# Altium PCB LoRa-E5-Study-Board-1401-02-28.PcbDoc
Units mm, origin at the board's own origin, x right, y up, seen from the top; angles counter-clockwise.
Board outline 90 x 50 mm, 2 copper layers (Top Layer, Bottom Layer); 84 components, 65 nets, 320 pads, 40 vias.
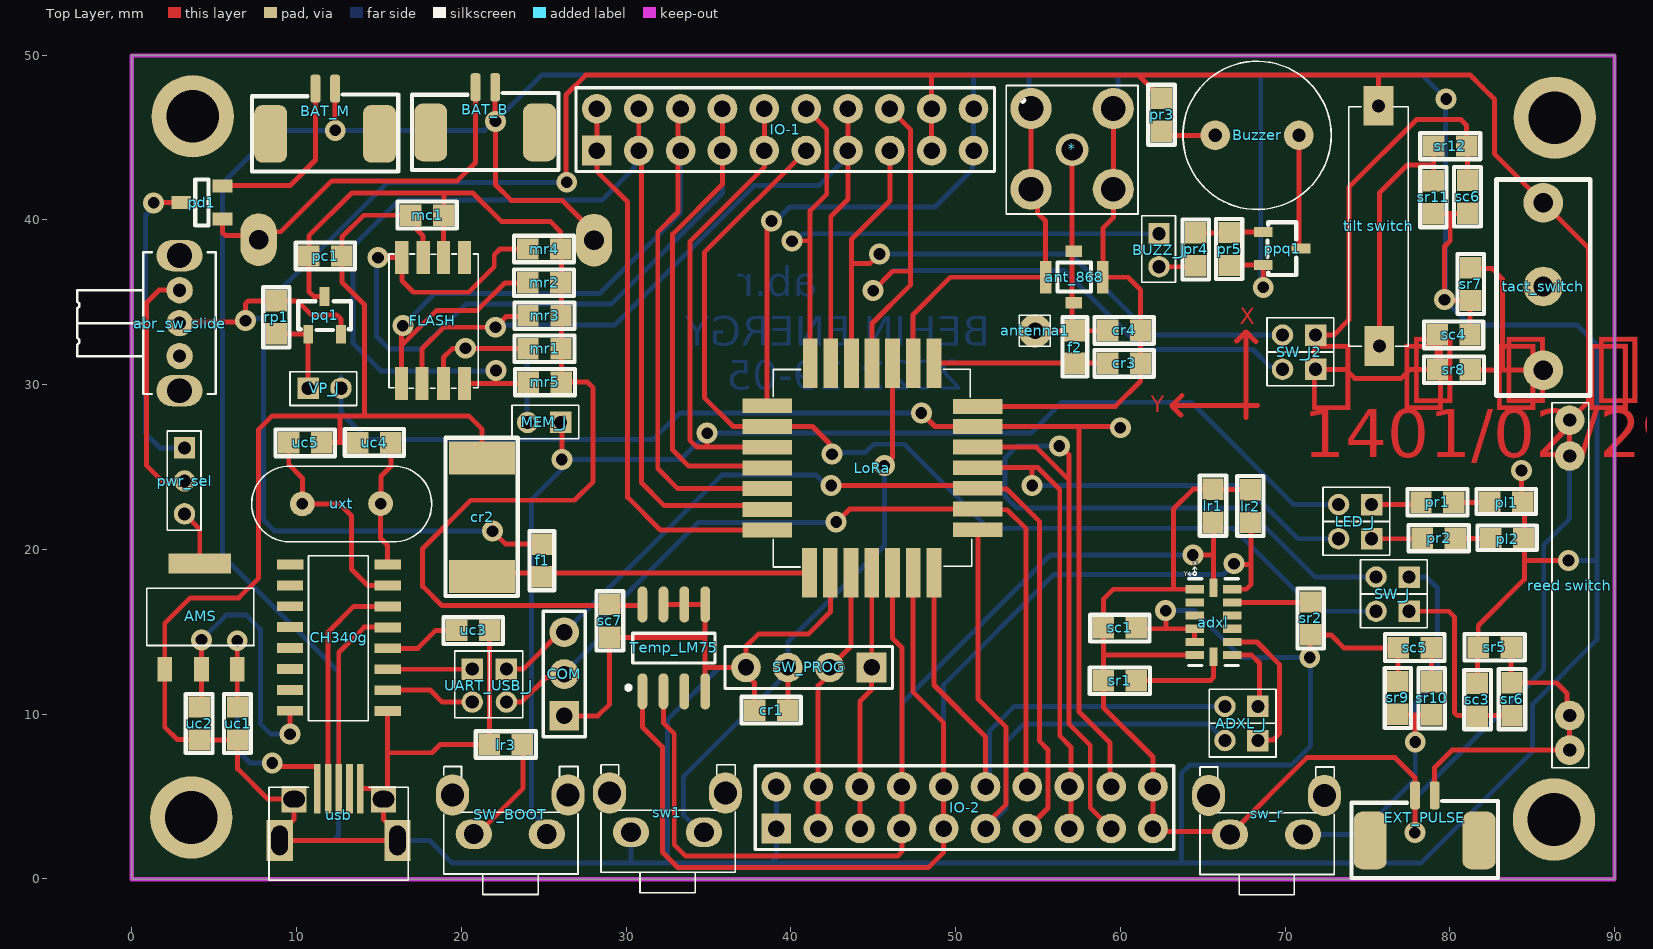
[diagram p0: Top Layer view]
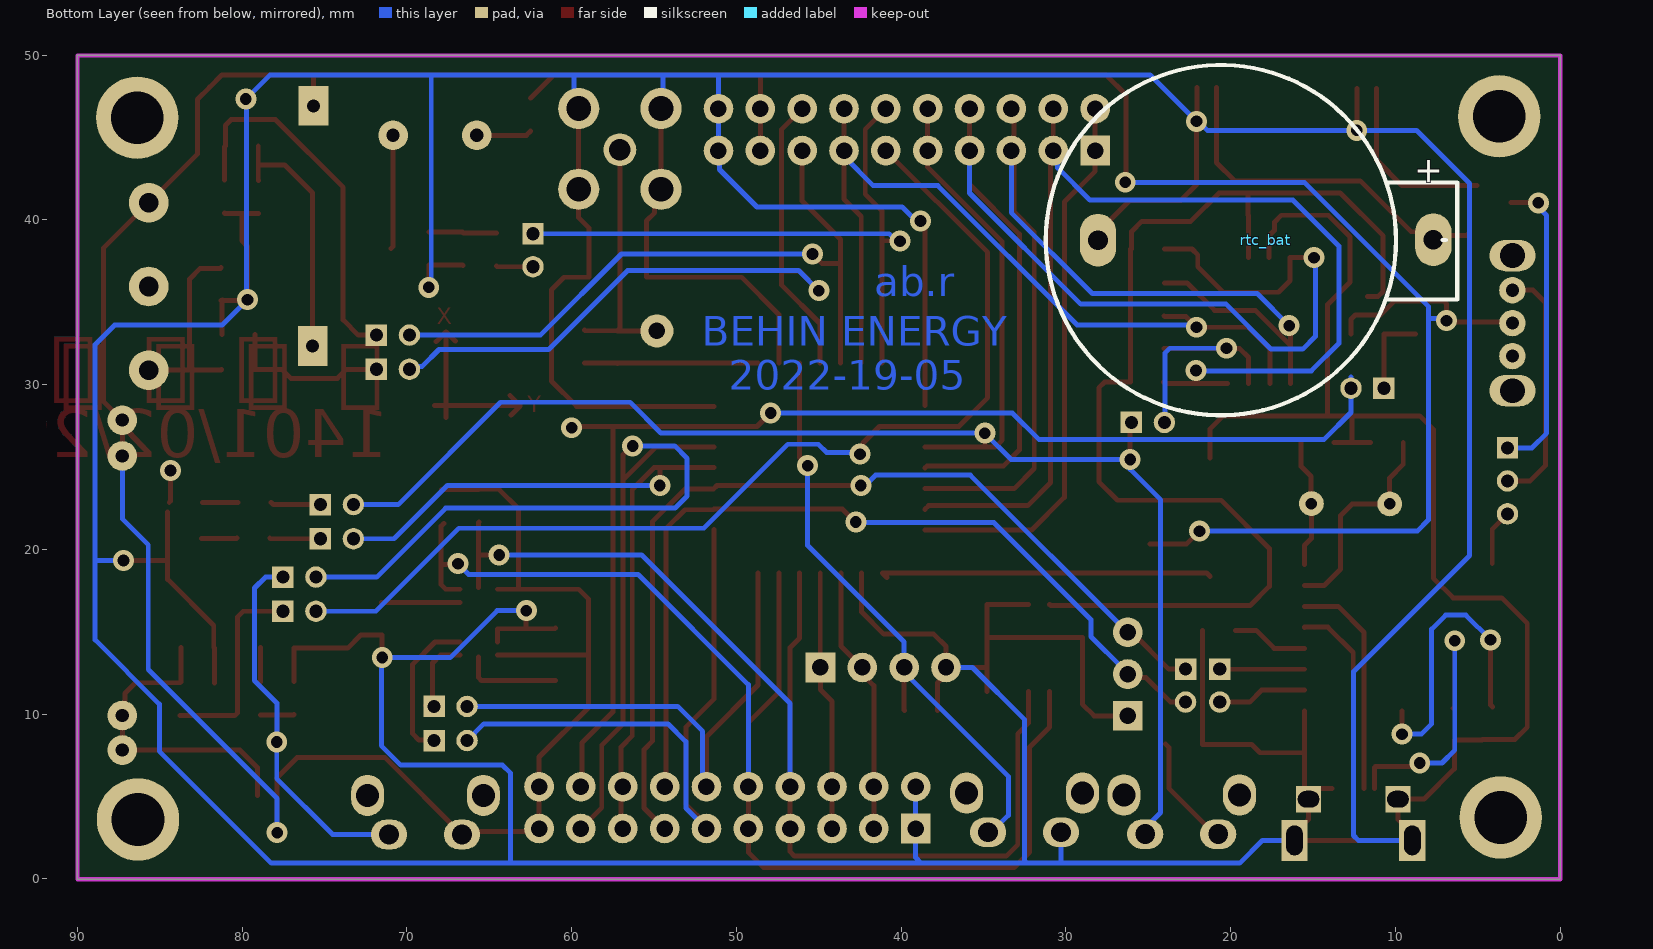
[diagram p1: Bottom Layer view, seen from below]

## Layer stack, top to bottom
Top Solder: solder mask 0.0102, Solder Resist, Dk 3.5
Top Layer: signal copper 0.0356
Dielectric 1: dielectric 0.32, FR-4, Dk 4.8
Bottom Layer: signal copper 0.0356
Bottom Solder: solder mask 0.0102, Solder Resist, Dk 3.5

## Board outline
0,-0.025 0,49.975 90,49.975 90,-0.025

## Design rules (kind name [scope] priority, off if disabled: settings)
Clearance [All] p1: gap=0.2 ignorepadtopadclearanceinfootprint=FALSE
PolygonConnect [All] p1: connectstyle=Relief reliefconductorwidth=0.254 reliefentries=4 polygonreliefangle="90 Angle" airgapwidth=0.254
RoutingVias [All] p1: holewidth=0.711 width=1.27 viastyle="Through Hole" minholewidth=0.711 minwidth=1.27 maxholewidth=0.711 maxwidth=1.27
SolderMaskExpansion [All] p1: expansion=0.102 istentingtop=FALSE
Width [All] p1: maxlimit=0.5 minlimit=0.3 preferedwidth=0.3
30 further rules are at their usual default settings.

## Classes and differential pairs
component class MEM: FLASH mc1 MEM_J mr1 mr2 mr3 mr4 mr5
component class Periph: BUZZ_J Buzzer IO-1 IO-2 LED_J pl1 pl2 ppq1 pr1 pr2 pr3 pr4 pr5
component class Sensor: adxl ADXL_J EXT_PULSE "reed switch" sc1 sc3 sc4 sc5 sc6 sc7 sr1 sr2 sr5 sr6 sr7 sr8 sr9 sr10 sr11 sr12 SW_J SW_J2 sw_r tact_switch Temp_LM75 "tilt switch"
component class USB: AMS CH340g UART_USB_J uc1 uc2 uc3 uc4 uc5 usb uxt
component class PWR: abr_sw_slide BAT_B BAT_M pc1 pd1 pq1 pwr_sel rp1 rtc_bat VP_J
component class LoRaE5: * ant_868 antenna1 COM cr1 cr2 cr3 cr4 f1 f2 LoRa lr1 lr2 lr3 sw1 SW_BOOT SW_PROG

## Components (designator, comment, footprint, x,y, rotation, side; value= is the part's Value field where it differs from the comment)
* "ant_sma" abr_sma_r_3d 57.075,44.3 r0 top
abr_sw_slide "Slide switch" abr_sw_slide__r_3d 2.9,33.725 r90 top locked
adxl "ic" abr_ic_adxl345_3d 65.65,15.575 r0 top
ADXL_J "pin header 2mm" abr_ph_2x2_2mm_3d_male 67.35,9.425 r0 top
AMS "Regulator" abr_fp_SOT-223_3d 4.2,15.925 r0 top
ant_868 "Radio" abr_ant_ufl_smd_3d 57.2,36.525 r180 top locked
antenna1 "Radio" abr_ant_hole_smd_2d 54.85,33.25 r90 top
BAT_B "YB2 SMD" abr_sw_yb_2p_3d 20.915,47.611 r90 top locked
BAT_M "YB2 SMD" abr_sw_yb_2p_3d 11.2,47.525 r90 top locked
BUZZ_J "pin header 2mm" abr_ph_2x1_2mm_3d_male 62.35,38.15 r90 top
Buzzer "LED" ABR_BUZZER_9MM_3D 68.3,45.125 r0 top
CH340g "Radio" abr_usb_ch344g_3d 12.45,14.425 r180 top
COM "Header 3" HDR1X3 26.25,9.885 r90 top
cr1 "100nf" abr_cap_0805_3d 38.8,10.225 r0 top
cr2 "10uf" abr_cap_d_3d 21.256,21.946 r90 top
cr3 "100nf" abr_cap_0805_3d 60.225,31.3 r180 top
cr4 "100nf" abr_cap_0805_3d 60.225,33.3 r180 top
EXT_PULSE "YB2 SMD" abr_sw_yb_2p_3d 77.94,4.636 r90 top
f1 "smd-0805" abr_fer_0805_3d 24.9,19.325 r270 top
f2 "smd-0805" abr_fer_0805_3d 57.225,32.275 r90 top
FLASH "SPI-FLASH" abr_ic_spi_flash_3d 18.275,33.875 r90 top
IO-1 "Header 10X2" HDR2X10 28.23,44.2 r0 top locked
IO-2 "Header 10X2" HDR2X10 39.12,3.05 r0 top locked
LED_J "pin header 2mm" abr_ph_2x2_2mm_3d_male 74.25,21.675 r0 top
LoRa "LoRa-E5" abr_lora_e5_hf_3d 44.925,24.925 r90 top locked
lr1 "100k" abr_res_0805_3d 65.625,22.65 r270 top
lr2 "100k" abr_res_0805_3d 67.9,22.625 r270 top
lr3 "470R" abr_res_0805_3d 22.7,8.15 r180 top
mc1 "100nf" abr_cap_0805_3d 17.925,40.275 r0 top
MEM_J "pin header 2mm" abr_ph_2x1_2mm_3d_male 25.025,27.7 r0 top
mr1 "10k" abr_res_0805_3d 25.05,32.175 r180 top
mr2 "10k" abr_res_0805_3d 25.025,36.175 r180 top
mr3 "10k" abr_res_0805_3d 25.05,34.175 r180 top
mr4 "10k" abr_res_0805_3d 25.025,38.225 r180 top
mr5 "10k" abr_res_0805_3d 25.075,30.15 r180 top
pc1 "100nf" abr_cap_0805_3d 11.75,37.8 r0 top
pd1 "abr_diode_shotkey" abr_diode_bat54c_3d 4.25,41.05 r180 top
pl1 "smd-0805" abr_led_g_0805_3d 83.425,22.85 r0 top
pl2 "smd-0805" abr_led_r_0805_3d 83.475,20.65 r0 top
ppq1 "transistor" abr_fp_sot-23_3d 69.825,38.25 r270 top
pq1 "irlm6402" irlm6402 11.85,33.05 r90 top
pr1 "2.2K" abr_res_0805_3d 79.25,22.85 r0 top
pr2 "2.2K" abr_res_0805_3d 79.325,20.675 r0 top
pr3 "2.2K" abr_res_0805_3d 62.5,46.375 r270 top
pr4 "2.2K" abr_res_0805_3d 64.575,38.2 r90 top
pr5 "2.2K" abr_res_0805_3d 66.6,38.225 r270 top
pwr_sel "pin header 2mm" abr_ph_3x1_2mm_3d_male 3.2,24.15 r90 top
"reed switch" "switch" abr_reed_sw_3d 87.275,17.825 r270 top
rp1 "100k" abr_res_0805_3d 8.775,34.075 r90 top
rtc_bat "battery holder" abr_bh_cr2332_3d 17.875,38.775 r180 bottom
sc1 "100nf" abr_cap_0805_3d 59.975,15.225 r180 top
sc3 "100nf" abr_cap_0805_3d 81.675,10.875 r270 top
sc4 "100nf" abr_cap_0805_3d 80.225,33.025 r180 top
sc5 "100nf" abr_cap_0805_3d 77.875,14.025 r0 top
sc6 "100nf" abr_cap_0805_3d 81.075,41.4 r90 top
sc7 "100nf" abr_cap_0805_3d 29,15.65 r270 top
sr1 "100k" abr_res_0805_3d 59.975,12.025 r0 top
sr2 "100k" abr_res_0805_3d 71.55,15.8 r270 top
sr5 "2.2K" abr_res_0805_3d 82.725,14.05 r0 top
sr6 "1k" abr_res_0805_3d 83.775,10.9 r90 top
sr7 "2.2K" abr_res_0805_3d 81.275,36.1 r90 top
sr8 "1k" abr_res_0805_3d 80.25,30.9 r0 top
sr9 "2.2K" abr_res_0805_3d 76.85,10.975 r270 top
sr10 "1k" abr_res_0805_3d 78.9,10.95 r270 top
sr11 "2.2K" abr_res_0805_3d 79,41.375 r90 top
sr12 "1k" abr_res_0805_3d 80.025,44.475 r180 top
sw1 "switch" abr_sw_tact_3d 32.512,4.013 r0 top
SW_BOOT "switch" abr_sw_tact_3d 22.975,3.9 r0 top
SW_J "pin header 2mm" abr_ph_2x2_2mm_3d_male 76.525,17.275 r0 top
SW_J2 "pin header 2mm" abr_ph_2x2_2mm_3d_male 70.85,31.962 r0 top
SW_PROG "Header 4" HDR1X4 44.9,12.825 r180 top
sw_r "switch" abr_sw_tact_3d 68.875,3.875 r0 top
tact_switch "switch" abr_proximity_switch_3d 85.675,35.95 r270 top
Temp_LM75 "ic" abr_ic_lm75_3d 32.9,14 r90 top
"tilt switch" "switch" abr_tilt_horiz_sw200d_3d 75.7,39.625 r90 top
UART_USB_J "pin header 2mm" abr_ph_2x2_2mm_3d_male 21.7,11.725 r90 top
uc1 "1uf" abr_cap_0805_3d 6.425,9.425 r90 top
uc2 "1uf" abr_cap_0805_3d 4.1,9.425 r90 top
uc3 "100nf" abr_cap_0805_3d 20.725,15.075 r180 top
uc4 "22pf" abr_cap_0805_3d 14.725,26.475 r0 top
uc5 "22pf" abr_cap_0805_3d 10.525,26.475 r180 top
usb "usb connector" abr_usb_micro_hoawey_p6_3d 12.55,3.9 r0 top locked
uxt "crystal" abr_crystal_dip_3d 12.725,22.762 r180 top
VP_J "pin header 2mm" abr_ph_2x1_2mm_3d_male 11.7,29.775 r180 top

## Footprints (in the part's own frame and the unit in brackets; to place one, negate y for a bottom-side part, rotate by r counter-clockwise, add the part's x,y. Pads: shape width x height; smd on the part's side, far side on the other; paste and mask are expansions set on the pad)
abr_ant_hole_smd_2d [mm]
  round 2 hole 1: 1(0,0.025)
  silkscreen extent -0.92,-0.9 0.95,0.97
abr_ant_ufl_smd_3d [mm]
  rect 0.7x2 smd: 1(-1.737,0.013) 3(1.737,0.013)
  rect 1x0.7 smd: 2(0.037,-1.562) 4(0.012,1.562)
  silkscreen extent -1.01,-0.89 1.01,0.89, body extent -1.69,-1.54 1.71,1.56, height 1.25
abr_bh_cr2332_3d [mm]
  oval 2.2x3.2 hole 1.2: 1(10.175,0.013) 2(-10.175,-0.012)
  silkscreen extent -13.35,-10.64 11.62,10.61, body extent -13.35,-11.06 11.15,10.94, height 8.5
ABR_BUZZER_9MM_3D [mm]
  round 1.8 hole 0.8: 1(-2.54,0) 2(2.54,0)
  silkscreen extent -4.5,-4.5 4.5,4.5, body extent -4.55,-4.55 4.55,4.55, height 5.6
abr_cap_0805_3d [mm]
  rect 1.3x1.3 smd: 0(-1,0) 1(1,0)
  silkscreen extent -1.8,-0.8 1.8,0.83, body extent -1,-0.62 1,0.63, height 1
abr_cap_d_3d [mm]
  rect 2x4 smd: 0(-3.596,0.006) 1(3.596,-0.006)
  silkscreen extent -4.77,-2.17 4.83,2.22, body extent -3.6,-2.14 3.7,2.16, height 2.81
abr_crystal_dip_3d [mm]
  round 1.5 hole 0.7: 1(-2.375,-0.012) 2(2.375,0.013)
  silkscreen extent -5.47,-2.29 5.45,2.31, body extent -5.67,-2.4 5.68,2.25, height 3.6
abr_diode_bat54c_3d [mm]
  rect 1.2x0.8 smd: 1(-1.25,1) 2(-1.25,-1) 3(1.25,0)
  silkscreen extent -0.4,-1.4 0.4,1.4, body extent -1.26,-1.51 1.24,1.49, height 1.05
abr_fer_0805_3d [mm]
  rect 1.3x1.3 smd: 0(-0.987,0.013) 1(0.988,-0.012)
  silkscreen extent -1.79,-0.76 1.81,0.74, body extent -0.97,-0.65 1.03,0.6, height 0.78
abr_fp_sot-23_3d [mm]
  rect 0.6x1.15 smd: 1(-1,-1.15) 2(1,-1.15) 3(0,1.15)
  silkscreen extent -1.6,-0.9 1.6,0.85, body extent -1.5,-1.25 1.5,1.25, height 1.05
abr_fp_SOT-223_3d [mm]
  rect 0.9x1.5 smd: 1(-2.2,-3.212) 2(0.025,-3.212) 3(2.2,-3.212)
  rect 3.8x1.2 smd: 4(-0.075,3.213)
  silkscreen extent -3.3,-1.76 3.22,1.71, body extent -3.32,-3.71 3.37,3.59, height 1.8
abr_ic_adxl345_3d [mm]
  rect 1.124x0.5 smd: 1(-1.138,2) 2(-1.138,1.2) 3(-1.138,0.4) 4(-1.138,-0.4) 5(-1.138,-1.2) 6(-1.138,-2) 8(1.13,-2) 9(1.138,-1.2) 10(1.138,-0.4) 11(1.138,0.4) 12(1.138,1.2) 13(1.138,2)
  rect 0.5x1.124 smd: 7(0,-2.1) 14(0,2.1)
  silkscreen extent -1.54,-2.63 1.5,3.35, body extent -1.48,-2.5 1.52,2.5, height 1
abr_ic_lm75_3d [mm]
  oval 2.2x0.6 smd: 1(-2.625,1.905) 2(-2.625,0.635) 3(-2.625,-0.635) 4(-2.625,-1.905) 5(2.65,-1.905) 6(2.65,-0.635) 7(2.65,0.635) 8(2.65,1.905)
  silkscreen extent -2.52,-2.5 0.9,2.88, body extent -2.97,-2.45 3.03,2.45, height 1.75
abr_ic_spi_flash_3d [mm]
  rect 2x0.8 smd: 1(-3.825,1.913) 2(-3.825,0.663) 3(-3.825,-0.637) 4(-3.825,-1.913) 5(3.825,-1.913) 6(3.825,-0.637) 7(3.825,0.587) 8(3.825,1.887)
  silkscreen extent -4.1,-2.76 4.05,2.66, body extent -4.08,-2.77 4.03,2.69, height 1.75
abr_led_g_0805_3d [mm]
  rect 1.3x1.3 smd: 0(-1,0) 1(1,0)
  silkscreen extent -1.8,-0.7 1.8,0.8, body extent -1.01,-0.58 1.01,0.67, height 1.1
abr_led_r_0805_3d [mm]
  rect 1.3x1.3 smd: 0(-1,0) 1(1,0)
  silkscreen extent -1.8,-0.7 1.8,0.8, body extent -1.05,-0.67 1.05,0.68, height 0.9
abr_lora_e5_hf_3d [mm]
  rect 3x0.9 smd: 1(-6.362,3.787) 2(-6.362,2.529) 3(-6.362,1.271) 4(-6.362,0.012) 5(-6.362,-1.246) 6(-6.362,-2.504) 7(-6.362,-3.763) 15(6.375,-3.763) 16(6.375,-2.504) 17(6.375,-1.246) 18(6.375,0) 19(6.375,1.25) 20(6.375,2.5) 21(6.375,3.75)
  rect 0.9x3 smd: 8(-3.738,-6.425) 9(-2.479,-6.425) 10(-1.221,-6.425) 11(0.025,-6.425) 12(1.275,-6.425) 13(2.525,-6.425) 14(3.75,-6.425) 22(3.787,6.362) 23(2.529,6.362) 24(1.271,6.362) 25(0.012,6.362) 26(-1.246,6.362) 27(-2.504,6.362) 28(-3.763,6.362)
  silkscreen extent -6,-6.05 6,6, body extent -5.99,-6.01 6.01,5.99, height 1.52
abr_ph_2x1_2mm_3d_male [mm]
  rect 1.3x1.3 hole 0.8: 1(1,0)
  round 1.3 hole 0.8: 2(-1,0)
  silkscreen extent -1.95,-1 2.1,1.05, body extent -1.95,-0.98 2.05,1.02, height 4.4
abr_ph_2x2_2mm_3d_male [mm]
  rect 1.3x1.3 hole 0.8: 1(1,-1.037) 3(1,1.038)
  round 1.3 hole 0.8: 2(-1,-1.037) 4(-1,1.038)
  silkscreen extent -1.95,-2.04 2.1,2.09, body extent -1.95,-2.01 2.05,2.06, height 4.4
abr_ph_3x1_2mm_3d_male [mm]
  rect 1.3x1.3 hole 0.8: 1(2,0)
  round 1.3 hole 0.8: 2(0,0) 3(-2,0)
  silkscreen extent -3,-1 3.02,1.05, body extent -2.97,-1 2.98,1, height 6
abr_proximity_switch_3d [mm]
  round 2.4 hole 1.2: 1(-5.08,0) 2(0,0) 3(5.08,0)
  silkscreen extent -6.5,-2.85 6.63,2.85, body extent -6.4,-2.9 11.64,2.9, height 12.14
abr_reed_sw_3d [mm]
  round 1.8 hole 0.8: 1(-10.012,0) 2(10.012,0) 3(-7.838,0) 4(7.912,0)
  silkscreen extent -11.06,-1.08 11.09,1.15, body extent -10.4,-1.1 10.42,1.1, height 2.2
abr_res_0805_3d [mm]
  rect 1.3x1.3 smd: 0(-1,0) 1(1,0)
  silkscreen extent -1.83,-0.8 1.82,0.8, body extent -1.07,-0.7 1.03,0.65, height 0.6
abr_sma_r_3d [mm]
  round 2 hole 1.3: 1(0,-0.05)
  round 2.5 hole 1.5: 2(2.5,-2.45) 3(2.5,2.45) 4(-2.5,2.45) 5(-2.5,-2.45)
  silkscreen extent -4,-3.95 4,3.85, body extent -3.18,-3.22 3.17,11.58, height 9.55
abr_sw_slide__r_3d [mm]
  round 1.6 hole 0.8: 1(2,0) 2(0,0) 3(-2,0)
  oval 1.9x2.8 hole 1.5: M2(-4.1,0) M2(4.1,0)
  silkscreen extent -4.3,-2.2 4.3,6.2, body extent -4.31,-2.28 4.3,6.09, height 4.7
abr_sw_tact_3d [mm]
  oval 2.2x1.8 hole 1.2: 1(-2.212,-1.188) 2(2.213,-1.188)
  oval 2x2.5 hole 1.4: 3(-3.512,1.188) 4(3.513,1.188)
  silkscreen extent -4.04,-4.85 4.11,2.91, body extent -4.39,-4.34 4.31,2.81, height 7.4
abr_sw_yb_2p_3d [mm]
  rrect50% 3.5x2 smd: 0(-2.311,2.769) 0(-2.311,-3.835)
  rrect50% 1.7x0.6 smd: 1(0.432,0.051) 2(0.432,-1.143)
  silkscreen extent -4.6,-4.98 0.08,3.91, body extent -4.59,-4.21 0.82,3.04, height 3.4
abr_tilt_horiz_sw200d_3d [mm]
  rect 2.4x1.8 hole 0.8: 1(-7.287,-0.025) 2(7.288,0.025)
  silkscreen extent -7.29,-1.79 7.24,1.83, body extent -7.81,-1.15 7.79,1.15
abr_usb_ch344g_3d [mm]
  rect 1.6x0.6 smd: 1(-3.075,4.25) 2(-3.075,2.979) 3(-3.075,1.707) 4(-3.075,0.436) 5(-3.075,-0.836) 6(-3.075,-2.107) 7(-3.075,-3.379) 8(-3.075,-4.65) 9(2.825,-4.65) 10(2.85,-3.382) 11(2.85,-2.114) 12(2.85,-0.846) 13(2.85,0.421) 14(2.85,1.689) 15(2.85,2.957) 16(2.85,4.225)
  silkscreen extent -1.9,-5.18 1.73,4.82, body extent -3.19,-5.19 2.95,4.78, height 1.88
abr_usb_micro_hoawey_p6_3d [mm]
  rect 0.4x3 smd: 1(-1.288,1.569) 2(-0.637,1.569) 3(0.012,1.569) 4(0.663,1.569) 5(1.312,1.569)
  rect 1.5x1.6 hole 1 slot 1.3 at 0 deg: 6(2.725,0.931) 9(-2.7,0.931)
  rect 1.6x2.5 hole 1 slot 1.8 at 90 deg: 7(3.575,-1.569) 8(-3.575,-1.569)
  silkscreen extent -4.23,-3.99 4.23,1.66, body extent -4.1,-4.43 4.1,1, height 2.58
HDR1X3 [mm] "Connector; Header; 3 Position"
  rect 1.8x1.8 hole 1: 1(0,0)
  round 1.8 hole 1: 2(2.54,0) 3(5.08,0)
  silkscreen extent -1.27,-1.27 6.35,1.27
HDR1X4 [mm] "Connector; Header; 4 Position"
  rect 1.8x1.8 hole 1: 1(0,0)
  round 1.8 hole 1: 2(2.54,0) 3(5.08,0) 4(7.62,0)
  silkscreen extent -1.27,-1.27 8.89,1.27
HDR2X10 [mm] "Connector; Header; 10x2 Position"
  rect 1.8x1.8 hole 1: 1(0,0)
  round 1.8 hole 1: 2(0,2.54) 3(2.54,0) 4(2.54,2.54) 5(5.08,0) 6(5.08,2.54) 7(7.62,0) 8(7.62,2.54) 9(10.16,0) 10(10.16,2.54) 11(12.7,0) 12(12.7,2.54) 13(15.24,0) 14(15.24,2.54) 15(17.78,0) 16(17.78,2.54) 17(20.32,0) 18(20.32,2.54) 19(22.86,0) 20(22.86,2.54)
  silkscreen extent -1.27,-1.27 24.13,3.81
irlm6402 [mm]
  rect 1.15x0.6 smd: 1(0,1.143) 2(0,-0.857) 3(2.3,0.143)
  silkscreen extent 0.25,-1.46 2,1.74, body extent -0.1,-1.36 2.4,1.64, height 1.05

## Part data
*: library part abr_sma_s_r
adxl: library part abr_ic_adxl345
ADXL_J LED_J SW_J SW_J2 UART_USB_J: library part abr_2x2_2mm
AMS: library part abr_reg_AMS1117
ant_868: library part abr_ant_ufl
antenna1: library part abr_anthole
BUZZ_J MEM_J VP_J: library part abr_2x1_2mm
Buzzer: library part abr_buzzer
CH340g: library part abr_usb_ch340g
COM: "Header, 3-Pin", LatestRevisionDate=17-Jul-2002, LatestRevisionNote="Re-released for DXP Platform.", Publisher="Altium Limited"
cr1 cr3 cr4 mc1 pc1 sc1 sc3 sc4 sc5 sc6 sc7 uc1 uc2 uc3 uc4 uc5: library part abr_cap_0805
cr2: library part abr_cap
f1 f2: library part abr_fer_0805
FLASH: library part abr_ic_at_45db161_e
IO-1 IO-2: "Header, 10-Pin, Dual row", LatestRevisionDate=17-Jul-2002, LatestRevisionNote="Re-released for DXP Platform.", Publisher="Altium Limited"
lr1 lr2 lr3 mr1 mr2 mr3 mr4 mr5 pr1 pr2 pr3 pr4 pr5 rp1 sr1 sr2 sr5 sr6 sr7 sr8 sr9 sr10 sr11 sr12: library part abr_res_0805
pd1: library part abr_diode_shatkey_bat54c
pl1 pl2: library part abr_led_0805
ppq1: library part abr_bc847
pwr_sel: library part abr_ph_3x1_2mm
"reed switch": library part abr_reed_sw
rtc_bat: library part abr_bh_rtc
sw1 SW_BOOT sw_r: library part abr_switch_tact
SW_PROG: "Header, 4-Pin", LatestRevisionDate=17-Jul-2002, LatestRevisionNote="Re-released for DXP Platform.", Publisher="Altium Limited"
tact_switch: library part abr_tact_switch
Temp_LM75: library part abr_ic_lm75
"tilt switch": library part abr_tilt_sw
usb: library part abr_usb_micro_female
uxt: library part abr_crystal

## Free pads (board coordinates)
  round 5 hole 3.2: 0(3.617,3.72) 0(3.7,46.275) 0(86.325,3.6) 0(86.375,46.2)

## Via types
v1: diameter 1.27, hole 0.711, Top Layer to Bottom Layer, 40 vias

## Nets (pads, with @x,y where several pads share a name; then routed paths per layer and width w, separated by ;. In a path a pad name is that pad's centre, name@x,y a point inside that pad or via, vN(x,y) a via of type N, cw(c..) or ccw(c..) an arc to the next point about the centre after c; other vN are vias at no path point)
ADD: adxl.12 sr2.0 | length 4.8
  Top Layer w0.3: adxl.12 sr2.0@71.55,16.775
ADX_INT1: adxl.8 ADXL_J.3 | length 4.6
  Top Layer w0.3: adxl.8 67.975,13.575 68.45,13.1 68.45,10.938 ADXL_J.3@68.875,10.513
ADX_INT2: adxl.9 ADXL_J.1 | length 9.1
  Top Layer w0.3: adxl.9 68.3,14.375 69.675,13 69.675,8.825 69.274,8.424 68.387,8.424 ADXL_J.1
ANT-xxx: *.1 ant_868.2 ant_868.4 antenna1.1 cr4.1 f2.1 | length 15.9
  Top Layer w0.3: antenna1.1 57.225,33.25 f2.1 ; *.1@57.075,44.7 57.075,33.425 f2.1 ; cr4.1 59.188,33.262 f2.1
BB: BAT_B.1 pd1.1 rtc_bat.1 | length 22.9
  Top Layer w0.3: pd1.1 5.5,39.226 5.676,39.05 7.413,39.05 rtc_bat.1@7.674,38.789 ; rtc_bat.1@7.675,38.788 8.161,39.273 9.049,39.273 12.14,42.364 19.764,42.364 20.864,43.464 BAT_B.1
BM: BAT_M.1 pd1.2 | length 11.1
  Top Layer w0.3: pd1.2@5.05,42.075 9.6,42.075 11.149,43.624 BAT_M.1
BUZZ: BUZZ_J.2 pr4.0 | length 2.2
  Top Layer w0.3: BUZZ_J.2 64.525,37.15 pr4.0
CH_V3: CH340g.4 uc3.1 | length 4.6
  Top Layer w0.3: CH340g.4 17.364,13.989 18.45,15.075 uc3.1
FLASH_CS: FLASH.4 IO-1.3 IO-1.4 LoRa.27 mr5.1 | length 71.3
  Top Layer w0.3: FLASH.4 22.081,30.05 ; v1(22.1,30.85) 22.081,30.831 22.081,30.05 ; mr5.1 23.975,30.05 22.081,30.05 ; IO-1.4 IO-1.3 30.925,44.045 30.925,24.05 32.325,22.65 38.333,22.65 LoRa.27
  Bottom Layer w0.3: v1(22.1,30.85) 22.075,30.825 15.1,30.825 13.425,32.5 13.425,38.4 16.225,41.2 28.55,41.2 30.505,43.155 30.505,43.935 IO-1.3
FLASH_RST: FLASH.3 MEM_J.2 mr1.1 | length 14.7
  Top Layer w0.3: FLASH.3 18.912,31.637 19.45,32.175 mr1.1
  Bottom Layer w0.3: v1(20.25,32.2) 23.7,32.2 23.975,31.925 23.975,28.1 MEM_J.2@24.025,28.05
GND: *.2 *.3 *.4 *.5 adxl.4 adxl.5 AMS.1 ant_868.1 ant_868.3 BAT_B.2 BAT_M.2 CH340g.1 COM.1 cr1.0 cr2.1 cr3.0 cr4.0 FLASH.7 IO-1.19 IO-1.20 IO-2.1 IO-2.2 LoRa.2 LoRa.14 LoRa.16 LoRa.22 lr3.1 mc1.0 pc1.1 pl1.1 pl2.1 ppq1.2 pr5.1 rtc_bat.2 sc1.0 sc3.0 sc4.0 sc5.0 sc6.0 sc7.1 sr2.1 sr5.0 sr7.0 sr9.0 sr11.0 sw1.1 SW_PROG.4 Temp_LM75.4 Temp_LM75.5 Temp_LM75.6 Temp_LM75.7 uc1.0 uc2.0 uc3.0 uc4.0 uc5.0 usb.5 usb.6 usb.7 usb.8 usb.9 | length 599.4
  Top Layer w0.3: uc5.0 12.625,26.475 ; BAT_M.2 12.343,45.432 v1(12.35,45.425) ; uc4.0 12.625,26.475 ; usb.5 14.675,5.469 15.275,4.869 usb.6 ; CH340g.1 15.525,7.628 ; FLASH.7 17.688,39.012 17.343,39.357 17.343,39.857 mc1.0 14.075,40.275 12.75,38.95 pc1.1 12.75,36.225 14.125,34.85 14.125,28.1 ; cr2.1 21.263,27.287 20.45,28.1 14.125,28.1 ; uc3.0 21.725,8.175 lr3.1 18.725,8.15 18.225,7.65 15.547,7.65 15.525,7.628 ; BAT_B.2 22.058,45.992 v1(22.075,45.975) 22.075,42.125 23.025,41.175 26.113,41.175 28.025,39.263 rtc_bat.2@28.025,38.763 ; COM.1 28.285,9.885 29,10.6 sc7.1 34.705,14.65 34.805,14.75 ; Temp_LM75.7 Temp_LM75.6 Temp_LM75.5 34.805,14.75 ; Temp_LM75.4 34.805,12.85 ; cr1.0 37.8,11.899 37.28,12.419 SW_PROG.4 ; LoRa.22 38.563,39.4 38.825,39.663 v1(38.825,39.925) ; LoRa.2 42.396,16.196 41.05,14.85 38.025,14.85 37.28,14.105 SW_PROG.4 ; LoRa.16 47.429,34.254 49.687,36.512 ant_868.3 55.463,39.937 54.965,40.435 54.965,41.46 *.5 *.4 ; LoRa.14 59.7,28.675 61.225,30.2 cr3.0 cr4.0 61.225,35.75 60.463,36.512 ant_868.1 58.938,39.487 59.575,40.125 *.2 *.3 ; sc1.0 61.025,15.175 62.768,15.175 ; v1(62.75,16.275) 62.768,16.257 62.768,15.175 ; adxl.5 adxl.4 62.768,15.175 ; pr5.1 66.625,37.25 ppq1.2 v1(68.675,35.9) v1@68.725,35.85 ; v1@71.525,13.125 71.525,14.8 sr2.1 72.8,14.8 73.6,14 76.85,14 sr9.0 ; sr11.0 80.025,40.375 ; v1(79.775,47.325) v1@79.8,47.3 ; sc6.0 81.05,40.375 80.025,40.375 ; sr7.0@81.2,35.125 sr7.0@81.225,35.1 ; sc4.0 sr7.0@81.225,35.1 ; sr7.0 sr7.0@81.225,35.1 ; sc3.0 81.675,14 sr5.0 81.725,15.375 84.525,18.175 84.525,19.413 ; v1(84.35,24.775) 84.35,22.925 pl1.1 ; pl1.1@84.525,22.25 84.525,19.413 ; v1(87.2,19.325) 84.613,19.325 84.525,19.413 ; 12.625,26.475 12.625,28.1 ; 12.625,28.1 14.125,28.1 ; 12.625,28.1 8.525,28.1 7.7,27.275 7.7,18.25 6.5,17.05 3.55,17.05 2,15.5 AMS.1 2,9.2 2.75,8.45 4.725,8.45 4.75,8.425 uc1.0 6.425,6.675 8.269,4.831 usb.9 9.85,3.607 9.674,3.431 9.625,3.431 8.975,2.781 usb.8 usb.7 16.125,2.781 15.475,3.431 15.451,3.431 15.275,3.607 usb.6 ; usb.6 15.525,5.081 15.525,7.628 ; 34.805,12.85 34.805,14.75 ; 34.805,12.85 34.83,12.825 SW_PROG.4 ; 80.025,40.375 80.025,38.725 79.675,38.375 v1(79.675,35.15) 79.725,35.1 sr7.0@81.225,35.1
  Bottom Layer w0.3: usb.8 12.256,2.331 12.55,2.625 12.55,12.575 5.5,19.625 5.5,42.2 8.725,45.425 21.414,45.425 21.964,45.975 v1(22.075,45.975) 24.9,48.8 51.05,48.8 ; usb.7 18.069,2.331 19.45,0.95 30.275,0.95 ; sw1.1 30.3,0.975 30.275,0.95 ; SW_PROG.4 35.675,12.825 32.525,9.675 32.525,1.126 32.349,0.95 ; v1(38.825,39.925) 39.087,39.925 39.937,40.775 48.75,40.775 51.025,43.05 IO-1.19@51.025,44.2 ; IO-2.2 IO-2.1 39.12,1.295 38.775,0.95 ; IO-1.19 IO-1.20 51.09,48.76 51.05,48.8 ; *.4 54.45,46.875 54.45,48.8 ; *.3 59.852,47.027 59.852,48.8 ; v1(62.75,16.275) 64.525,16.275 67.375,13.425 v1(71.5,13.425) ; v1(68.675,35.9) 68.525,36.05 68.525,48.8 ; v1@71.55,13.404 71.55,8.075 70.375,6.9 64.2,6.9 63.725,6.425 63.725,0.95 ; v1(87.2,19.325) 88.745,19.325 ; 30.275,0.95 32.349,0.95 ; 32.349,0.95 38.775,0.95 ; 38.775,0.95 63.725,0.95 ; 51.05,48.8 54.45,48.8 ; 54.45,48.8 59.852,48.8 ; 59.852,48.8 68.525,48.8 ; 63.725,0.95 78.225,0.95 85.025,7.75 85.025,10.6 88.925,14.5 88.925,32.425 87.75,33.6 81.225,33.6 v1(79.675,35.15) 79.725,35.2 79.725,47.275 v1(79.775,47.325) 78.3,48.8 68.525,48.8
I2C2-SCL: adxl.14 IO-2.7 IO-2.8 LoRa.5 lr1.1 Temp_LM75.2 | length 72.6
  Top Layer w0.3: Temp_LM75.2 32.265,9.46 32.925,8.8 32.925,2.075 33.625,1.375 46.475,1.375 46.74,1.64 IO-2.8 46.74,14.035 46.175,14.6 46.175,18.558 LoRa.5 ; v1(64.4,19.65) 65.65,19.65 ; lr1.1 65.65,21.625 65.65,19.65 ; adxl.14 65.65,19.65
  Bottom Layer w0.3: IO-2.8 46.74,10.64 55.75,19.65 v1(64.4,19.65)
I2C2_SDA: adxl.13 IO-2.9 IO-2.10 LoRa.6 lr2.1 Temp_LM75.1 | length 79.1
  Top Layer w0.3: Temp_LM75.1 30.995,9.205 32.2,8 32.2,1.625 33.15,0.675 48.35,0.675 49.28,1.605 IO-2.9 IO-2.10 49.28,9.47 47.429,11.321 LoRa.6 ; v1@66.6,19.075 67.925,19.075 ; adxl.13 67.65,17.575 67.925,17.85 67.925,19.075 ; lr2.1@67.75,21.575 67.925,21.4 67.925,19.075
  Bottom Layer w0.3: IO-2.10 49.28,11.78 55.975,18.475 66.264,18.475 66.9,19.111 v1(66.9,19.125)
LED_G: LED_J.3 pr1.0 | length 3.1
  Top Layer w0.3: LED_J.3 78.113,22.713 pr1.0
LED_R: LED_J.1 pr2.0 | length 3.1
  Top Layer w0.3: LED_J.1 78.288,20.638 pr2.0
MCU_PERIPH_PWR_EN: pq1.1 rp1.0 VP_J.1 | length 4.5
  Top Layer w0.3: rp1.0 10.682,33.075 pq1.1 10.707,30.457 10.7,30.45
MCU_RX1: COM.2 IO-2.14 LoRa.9 UART_USB_J.2 | length 52.5
  Top Layer w0.3: UART_USB_J.2 22.749,10.737 23.662,10.737 25.145,12.22 26.045,12.22 COM.2 ; v1@42.925,21.8 43.571,22.446 LoRa.9 51.395,22.401 53.124,22.401 54.286,21.239 54.286,5.664 IO-2.14
  Bottom Layer w0.3: COM.2@26.55,12.775 28.475,14.7 28.475,15.725 34.375,21.625 42.725,21.625 v1(42.75,21.65)
MCU_RX1_J: CH340g.2 UART_USB_J.4 | length 5.4
  Top Layer w0.3: CH340g.2 18.129,11.446 18.85,10.725 UART_USB_J.4
MCU_RX2: IO-1.16 LoRa.18 SW_J2.2 | length 47.5
  Top Layer w0.3: LoRa.18 44.925,33.7 47.26,36.035 47.26,36.875 ; v1(45,35.7) 46.175,36.875 47.26,36.875 ; IO-1.16 47.26,45.49 47.26,36.875
  Bottom Layer w0.3: v1(45,35.7) 46.225,36.925 56.6,36.925 61.4,32.125 68.05,32.125 69.072,31.103 69.672,31.103 SW_J2.2
MCU_TX1: COM.3 IO-2.13 LoRa.10 UART_USB_J.1 | length 57.9
  Top Layer w0.3: UART_USB_J.1 23.75,12.725 25.99,14.965 COM.3 ; v1(42.45,23.875) 51.179,23.875 51.404,23.651 53.124,23.651 55.1,21.675 55.1,8.35 55.61,7.84 55.61,4.3 IO-2.13
  Bottom Layer w0.3: COM.3@26.145,14.845 35.8,24.5 41.563,24.5 42.188,23.875 v1(42.45,23.875)
MCU_TX1_J: CH340g.3 UART_USB_J.3 | length 5.1
  Top Layer w0.3: CH340g.3 20.655,12.718 UART_USB_J.3
MCU_TX2: IO-1.15 LoRa.19 SW_J2.4 | length 42.3
  Top Layer w0.3: LoRa.19 43.675,37.35 ; v1(45.389,37.925) 44.814,37.35 43.675,37.35 ; IO-1.15 46.01,41.135 43.675,38.8 43.675,37.35
  Bottom Layer w0.3: v1(45.389,37.925) 56.975,37.925 61.9,33 SW_J2.4
MCULP_RX: IO-2.18 LoRa.13 VP_J.2 | length 73.5
  Top Layer w0.3: v1(47.925,28.275) 48.75,27.45 LoRa.13 57.5,27.45 ; IO-2.18@59.375,5.7 59.375,8.25 57.5,10.125 57.5,27.45 ; v1@59.8,27.45 57.5,27.45
  Bottom Layer w0.3: 12.7,30.45 12.7,28.3 14.325,26.675 31.65,26.675 33.25,28.275 v1(47.925,28.275)
  other v1: 60,27.375
MCULP_TX: IO-2.17 LoRa.12 SW_J.4 | length 61
  Top Layer w0.3: LoRa.12 54.9,26.2 56.875,24.225 ; v1@56.55,26.075 56.875,25.75 56.875,24.225 ; IO-2.17 58.175,4.315 58.175,8.115 56.875,9.415 56.875,24.225
  Bottom Layer w0.3: v1(56.3,26.275) 53.75,26.275 53,25.525 53,23.225 53.725,22.5 67.65,22.5 71.837,18.313 SW_J.4
MSW: sc5.1 sr10.0 | length 2.1
  Top Layer w0.3: sc5.1 78.875,11.975 sr10.0
Netadxl_7: adxl.7 sr1.1 | length 6
  Top Layer w0.3: sr1.1 65.474,12.025 65.65,12.201 adxl.7
NetBuzzer_1: Buzzer.1 pr3.1 | length 3.4
  Top Layer w0.3: pr3.1 62.75,45.125 Buzzer.1
NetBuzzer_2: Buzzer.2 ppq1.3 | length 6.9
  Top Layer w0.3: Buzzer.2 70.84,38.385 ppq1.3
Netlr3_0: lr3.0 SW_BOOT.1 | length 6.9
  Top Layer w0.3: SW_BOOT.1 20.963,2.712 23.75,5.5 23.75,7.975 lr3.0@23.95,8.175
Netpl1_0: pl1.0 pr1.1 | length 2.2
  Top Layer w0.3: pr1.1 pl1.0
Netpl2_0: pl2.0 pr2.1 | length 2.2
  Top Layer w0.3: pr2.1 80.35,20.65 pl2.0
Netppq1_1: ppq1.1 pr4.1 pr5.0 | length 4.1
  Top Layer w0.3: pr4.1 66.575,39.2 pr5.0 66.625,39.25 ppq1.1
Netsr7_1: sr7.1 sr8.1 tact_switch.3 | length 12.2
  Top Layer w0.3: sr8.1 81.28,30.87 83.2,30.87 ; sr7.1 81.325,37.05 82.55,37.05 83.2,36.4 83.2,30.87 ; tact_switch.3 83.2,30.87
Netsr11_1: "tilt switch.1" sr11.1 sr12.1 | length 15.2
  Top Layer w0.3: 75.725,32.612 75.725,41.625 77.425,43.325 78.912,43.325 79.025,43.438 ; sr11.1 79.025,42.4 79.025,43.325 79.025,43.438 ; sr12.1 79.025,43.438
PA0-T2-CH1: IO-1.11 LoRa.23 SW_J.2 | length 64.5
  Top Layer w0.3: IO-1.11 34.75,38.02 34.75,37.6 34.75,29.2 36.496,27.454 LoRa.23 41.321,27.454 42.32,26.455 42.32,25.955 v1(42.5,25.775)
  Bottom Layer w0.3: v1(42.5,25.775) 42.611,25.886 44.536,25.886 45.025,26.375 46.875,26.375 51.975,21.275 66.85,21.275 71.887,16.238 SW_J.2
PA9-T1-CH2: BUZZ_J.1 IO-1.12 LoRa.21 | length 40.2
  Top Layer w0.3: v1@39.8,38.7 39.825,38.725 41.175,38.725 ; IO-1.12 42.18,45.49 42.18,41.555 41.175,40.55 41.175,38.725 ; LoRa.21 41.175,38.725
  Bottom Layer w0.3: v1(40.075,38.7) 40.286,38.7 40.736,39.15 BUZZ_J.1
PB0-TCXO: IO-1.1 IO-1.2 LoRa.28 | length 33.7
  Top Layer w0.3: IO-1.2 IO-1.1 28.23,42.945 30.1,41.075 30.1,23.15 32.087,21.163 LoRa.28
PB3-ADC2: ADXL_J.2 IO-2.11 LoRa.8 | length 39.3
  Top Layer w0.3: LoRa.8 51.35,10.925 53.07,9.205 53.07,4.52 51.82,3.27 IO-2.11
  Bottom Layer w0.3: IO-2.11 53.07,4.3 53.07,8.32 54.15,9.4 65.338,9.4 ADXL_J.2
PB4-ADC4: ADXL_J.4 IO-2.12 LoRa.7 | length 32.7
  Top Layer w0.3: LoRa.7 48.688,11.762 51.82,8.63 IO-2.12
  Bottom Layer w0.3: IO-2.12 52.05,5.82 52.05,8.95 53.563,10.463 ADXL_J.4
PB5: IO-2.15 IO-2.16 LED_J.2 LoRa.11 | length 47.5
  Top Layer w0.3: LoRa.11 54.65,24.95 ; v1@54.625,23.85 v1(54.65,23.875) 54.65,24.95 ; IO-2.15 57,3.15 57,8 56.325,8.675 56.325,23.625 55,24.95 54.65,24.95
  Bottom Layer w0.3: v1(54.65,23.875) 67.55,23.875 70.787,20.638 LED_J.2
PB13-BOOT: IO-1.9 IO-1.10 LED_J.4 LoRa.24 MEM_J.1 SW_BOOT.2 | length 105.2
  Top Layer w0.3: MEM_J.1@26.025,28.05 26.1,27.975 v1(26.1,25.45) ; v1@34.975,27.175 34.9,27.1 34.9,26.196 ; IO-1.10 IO-1.9 38.39,43.19 33.875,38.675 33.875,26.625 34.304,26.196 34.9,26.196 ; LoRa.24 34.9,26.196
  Bottom Layer w0.3: SW_BOOT.2@25.175,3.1 24.25,4.025 24.25,23 26.1,24.85 v1(26.1,25.45) 33.325,25.45 v1(34.925,27.05) 54.575,27.05 56.45,28.925 64.325,28.925 70.537,22.713 LED_J.4
ReedSW: "reed switch.2" "reed switch.4" EXT_PULSE.2 sr5.1 sr6.1 | length 19.6
  Top Layer w0.3: EXT_PULSE.2 79.083,6.758 80.138,7.813 87.275,7.813 87.275,9.913 87.112,10.075 87.112,11.263 86.475,11.9 sr6.1 83.725,11.95 83.725,12.15 sr5.1
RF: cr3.1 f2.0 LoRa.15 | length 10.5
  Top Layer w0.3: LoRa.15 57.2,31.3 f2.0 57.225,31.3 cr3.1
RST: cr1.1 LoRa.17 sw1.2 SW_PROG.3 | length 37
  Top Layer w0.3: cr1.1 39.82,10.245 SW_PROG.3 ; v1(45.675,25.075) 46.171,25.571 LoRa.17
  Bottom Layer w0.3: sw1.2 34.525,2.825 33.5,3.85 33.5,6.225 39.82,12.545 39.82,14.37 45.675,20.225 v1(45.675,25.075)
RSW: sc3.1 sr6.0 SW_J.1 | length 12.3
  Top Layer w0.3: SW_J.1 79.938,16.238 80.275,15.9 80.275,10.076 80.451,9.9 sr6.0
SPI2_MISO: FLASH.8 IO-1.7 IO-1.8 LoRa.25 mr4.1 | length 73.1
  Top Layer w0.3: v1@14.925,37.725 v1(14.95,37.7) FLASH.8 16.388,36.313 17.1,35.6 20.45,35.6 22,37.15 22,37.875 22.35,38.225 mr4.1 ; IO-1.8 IO-1.7 35.85,42.15 32.825,39.125 32.825,26.025 33.8,25.05 38.45,25.05 LoRa.25
  Bottom Layer w0.3: v1(14.95,37.7) 14.85,37.6 14.85,32.925 15.625,32.15 17.55,32.15 20.275,34.875 29.1,34.875 35.85,41.625 IO-1.7
SPI2_MOSI: FLASH.1 IO-1.5 IO-1.6 LoRa.26 mr2.1 | length 65.8
  Top Layer w0.3: FLASH.1 16.362,32.362 ; v1(16.45,33.575) 16.362,33.487 16.362,32.362 ; mr2.1 22.65,36.175 20.975,34.5 18.5,34.5 16.362,32.362 ; IO-1.6 33.15,46.58 33.15,40.475 31.925,39.25 31.925,24.9 33.146,23.679 LoRa.26
  Bottom Layer w0.3: v1(16.45,33.575) 18.398,35.523 28.398,35.523 33.31,40.435 IO-1.5
SPI2_SCK: FLASH.2 IO-1.13 IO-1.14 LoRa.20 mr3.1 | length 51.3
  Top Layer w0.3: FLASH.2 17.612,32.163 18.925,33.475 v1(22.075,33.475) 22.726,34.126 24.001,34.126 mr3.1 ; LoRa.20 42.425,40.2 43.47,41.245 IO-1.13 IO-1.14
  Bottom Layer w0.3: v1(22.075,33.475) 22.225,33.625 29.325,33.625 37.775,42.075 41.7,42.075 43.47,43.845 IO-1.13
SW: sr9.1 sr10.1 SW_J.3 sw_r.2 | length 26.1
  Top Layer w0.3: sr9.1 76.875,9.95 77.887,9.95 ; v1(77.9,8.3) 77.887,8.313 77.887,9.95 ; sr10.1 77.887,9.95
  Bottom Layer w0.3: sw_r.2 74.513,2.688 77.9,6.075 v1(77.9,8.3) 77.887,8.313 77.887,10.663 79.25,12.025 79.25,17.65 78.587,18.313 SW_J.3
SWC: IO-2.5 IO-2.6 LoRa.4 SW_PROG.1 | length 15.8
  Top Layer w0.3: IO-2.5 IO-2.6 44.2,10.775 44.9,11.475 SW_PROG.1 44.913,12.838 LoRa.4
SWD: IO-2.3 IO-2.4 LoRa.3 SW_PROG.2 | length 16.3
  Top Layer w0.3: IO-2.3 IO-2.4 41.66,11.719 42.36,12.419 SW_PROG.2 43.654,14.119 LoRa.3
TAMPER: sc4.1 sr8.0 SW_J2.1 | length 10
  Top Layer w0.3: SW_J2.1 73.675,30.925 74.225,30.375 77.05,30.375 77.6,30.925 sr8.0@79.225,30.925 ; sc4.1 sr8.0@79.225,30.925 ; sr8.0 sr8.0@79.225,30.925
Tilt: sc6.1 sr12.0 SW_J2.3 | length 22.8
  Top Layer w0.3: SW_J2.3 72.95,33 73.875,33.925 73.875,41.975 77.975,46.075 80.675,46.075 81.025,45.725 sr12.0 81.075,44.425 sc6.1
UD+: CH340g.5 usb.3 | length 11.9
  Top Layer w0.3: usb.3 12.562,13.738 14.1,15.275 15.511,15.275 CH340g.5
UD-: CH340g.6 usb.2 | length 13.8
  Top Layer w0.3: usb.2 11.913,14.962 13.482,16.532 CH340g.6
USB5V: AMS.3 uc1.1 usb.1 | length 17.4
  Top Layer w0.3: v1(6.4,14.45) AMS.3 6.4,10.45 uc1.1 uc1.1@6.499,10.351 ; v1(8.525,7.025) 8.787,7.025 8.994,6.819 11.212,6.819 11.262,6.769 usb.1
  Bottom Layer w0.3: v1(6.4,14.45) 6.4,7.8 7.175,7.025 v1(8.525,7.025)
V3.3: AMS.2 CH340g.16 uc2.1 | length 17.9
  Top Layer w0.3: uc2.1 4.225,10.55 AMS.2 v1(4.225,14.5) v1@4.25,14.525 ; v1(9.6,8.775) CH340g.16
  Bottom Layer w0.3: v1(4.225,14.5) 5.725,16 6.95,16 7.8,15.15 7.8,9.4 8.425,8.775 v1(9.6,8.775)
V3.3_2: AMS.4 pwr_sel.3 | length 3.4
  Top Layer w0.3: pwr_sel.3 4.125,21.225 AMS.4
VBat: pd1.3 pwr_sel.1 | length 18.3
  Top Layer w0.3: v1@1.65,41.025 1.675,41.05 pd1.3
  Bottom Layer w0.3: v1(1.325,41.025) 1.325,40.763 0.825,40.263 0.825,27.05 1.725,26.15 pwr_sel.1
VBoard: "reed switch.1" "reed switch.3" "tilt switch.2" abr_sw_slide.2 adxl.1 adxl.6 EXT_PULSE.1 f1.0 IO-1.17 IO-1.18 IO-2.19 IO-2.20 lr1.0 lr2.0 pq1.2 pr3.0 rp1.1 sc1.1 sr1.0 sw_r.1 tact_switch.1 | length 246.3
  Top Layer w0.3: abr_sw_slide.2 2.975,33.8 6.825,33.8 v1(6.9,33.875) 6.9,34.899 7.076,35.075 10.05,35.075 10.9,34.225 12.425,34.225 12.707,33.943 pq1.2 ; v1(21.9,21.1) 22.688,20.312 f1.0 ; v1(26.4,42.275) 26.35,42.325 26.35,47.575 27.55,48.775 28.825,48.775 28.85,48.8 48.5,48.8 ; IO-1.17 IO-1.18 48.55,48.75 48.5,48.8 ; pr3.0 61.075,48.8 ; adxl.6 59.025,13.575 58.975,13.625 ; adxl.1 63.275,17.575 ; lr2.0 65.65,23.625 lr1.0 64.425,23.65 63.225,22.45 63.225,17.625 63.275,17.575 ; 75.675,47.187 75.675,48.725 75.6,48.8 ; v1(77.875,2.8) 77.882,2.807 77.882,5.061 EXT_PULSE.1 77.874,5.083 77.874,6.151 76.675,7.35 71.325,7.35 sw_r.1 66.481,2.869 62.161,2.869 IO-2.19 IO-2.20 61.98,7.395 58.975,10.4 sr1.0 58.975,13.625 ; 87.275,25.663 87.275,27.838 88.425,28.988 88.425,38.28 tact_switch.1 82.725,43.98 82.725,47.3 81.975,48.05 81.225,48.8 75.6,48.8 ; 48.5,48.8 61.075,48.8 ; 58.975,13.625 sc1.1 58.975,16.975 59.575,17.575 63.275,17.575 ; 61.075,48.8 75.6,48.8
  Bottom Layer w0.3: v1@6.825,34 8,34 ; v1(21.9,21.1) 8.675,21.1 8,21.775 8,34 ; v1(26.4,42.275) 15.525,42.275 8,34.75 8,34 ; sw_r.1@66.663,2.637 sw_r.1 ; v1(77.875,2.8) 77.875,4.875 85.7,12.7 85.7,20.275 87.275,21.85 87.275,25.663
VMCU: cr2.0 f1.1 LoRa.1 | length 20.4
  Top Layer w0.3: cr2.0 21.462,18.563 LoRa.1 LoRa.1@40.863,18.287
VPeriph: FLASH.6 mc1.1 mr1.0 mr2.0 mr3.0 mr4.0 mr5.0 pc1.0 pq1.3 sc7.0 Temp_LM75.8 | length 70.8
  Top Layer w0.3: pq1.3 11.05,35.35 10.75,35.65 pc1.0 10.75,39.025 13.35,41.625 18.938,41.625 ; FLASH.6 18.912,40.263 mc1.1 18.938,40.288 18.938,41.625 ; mr4.0 26.025,39.275 25.4,39.9 22.425,39.9 20.7,41.625 18.938,41.625 ; mr4.0@26.075,38.225 26.075,36.175 26.075,34.175 26.075,32.175 mr5.0 27.65,30.15 28,29.8 28,24.1 26.875,22.975 20.575,22.975 17.65,20.05 17.65,17.75 18.825,16.575 30.92,16.575 Temp_LM75.8
VSel: abr_sw_slide.1 pwr_sel.2 | length 14.9
  Top Layer w0.3: abr_sw_slide.1 1.65,35.725 0.9,34.975 0.9,25.075 1.701,24.274 1.825,24.15 pwr_sel.2
XI: CH340g.7 uc5.1 uxt.2 | length 13.2
  Top Layer w0.3: uc5.1 9.525,25.15 10.35,24.325 uxt.2 12.625,22.75 13.325,22.05 13.325,18.8 14.321,17.804 CH340g.7
XO: CH340g.8 uc4.1 uxt.1 | length 7.8
  Top Layer w0.3: CH340g.8 15.525,20.225 15.1,20.65 uxt.1 15.125,22.8 15.125,24.425 15.725,25.025 uc4.1
pads on no net: abr_sw_slide.3 abr_sw_slide.M2 adxl.2 adxl.3 adxl.10 adxl.11 BAT_B.0 BAT_M.0 CH340g.9 CH340g.10 CH340g.11 CH340g.12 CH340g.13 CH340g.14 CH340g.15 EXT_PULSE.0 FLASH.5 sw1.3 sw1.4 SW_BOOT.3 SW_BOOT.4 sw_r.3 sw_r.4 tact_switch.2 Temp_LM75.3 usb.4
copper on no net: | length 13.7
  Top Layer w0.3: 63.122,28.723 68.322,28.723 ; 63.125,28.7 63.687,28.138 ; 63.15,28.75 63.75,29.35 ; 67.062,32.637 67.625,33.2 ; 67.625,28 67.625,33.2 ; 68.225,32.6 67.625,33.2

## Keep-outs
Keep-Out Layer:
  the board outline again, w0.254

## Other copper
Top Layer:
  text "X" at 67.254,33.654 h1
  text "Y" at 61.854,28.329 h1
  text "ﻦﯿﻬﺑ" at 76.2,27.525 h7
  text "ﯼﮊﺮﻧﺍ" at 70,27.1 h7
  text "1401/02/29" at 71.1,24.625 h5
Bottom Layer:
  text "ab.r" at 41.65,35.35 h1.8
  text "BEHIN ENERGY" at 52.1,32.35 h1.8
  text "2022-19-05" at 50.475,29.675 h1.8

## Text inside footprints (layer, text, board x,y; h text height)
adxl: Top Overlay "x" at 64.419,19.026 h0.3; Top Overlay "Y" at 63.844,18.376 h0.3
rtc_bat: Bottom Overlay "+" at 8.85,42.263 h1.52